# EAGLE board Board1 (EAGLE 7.5.0)
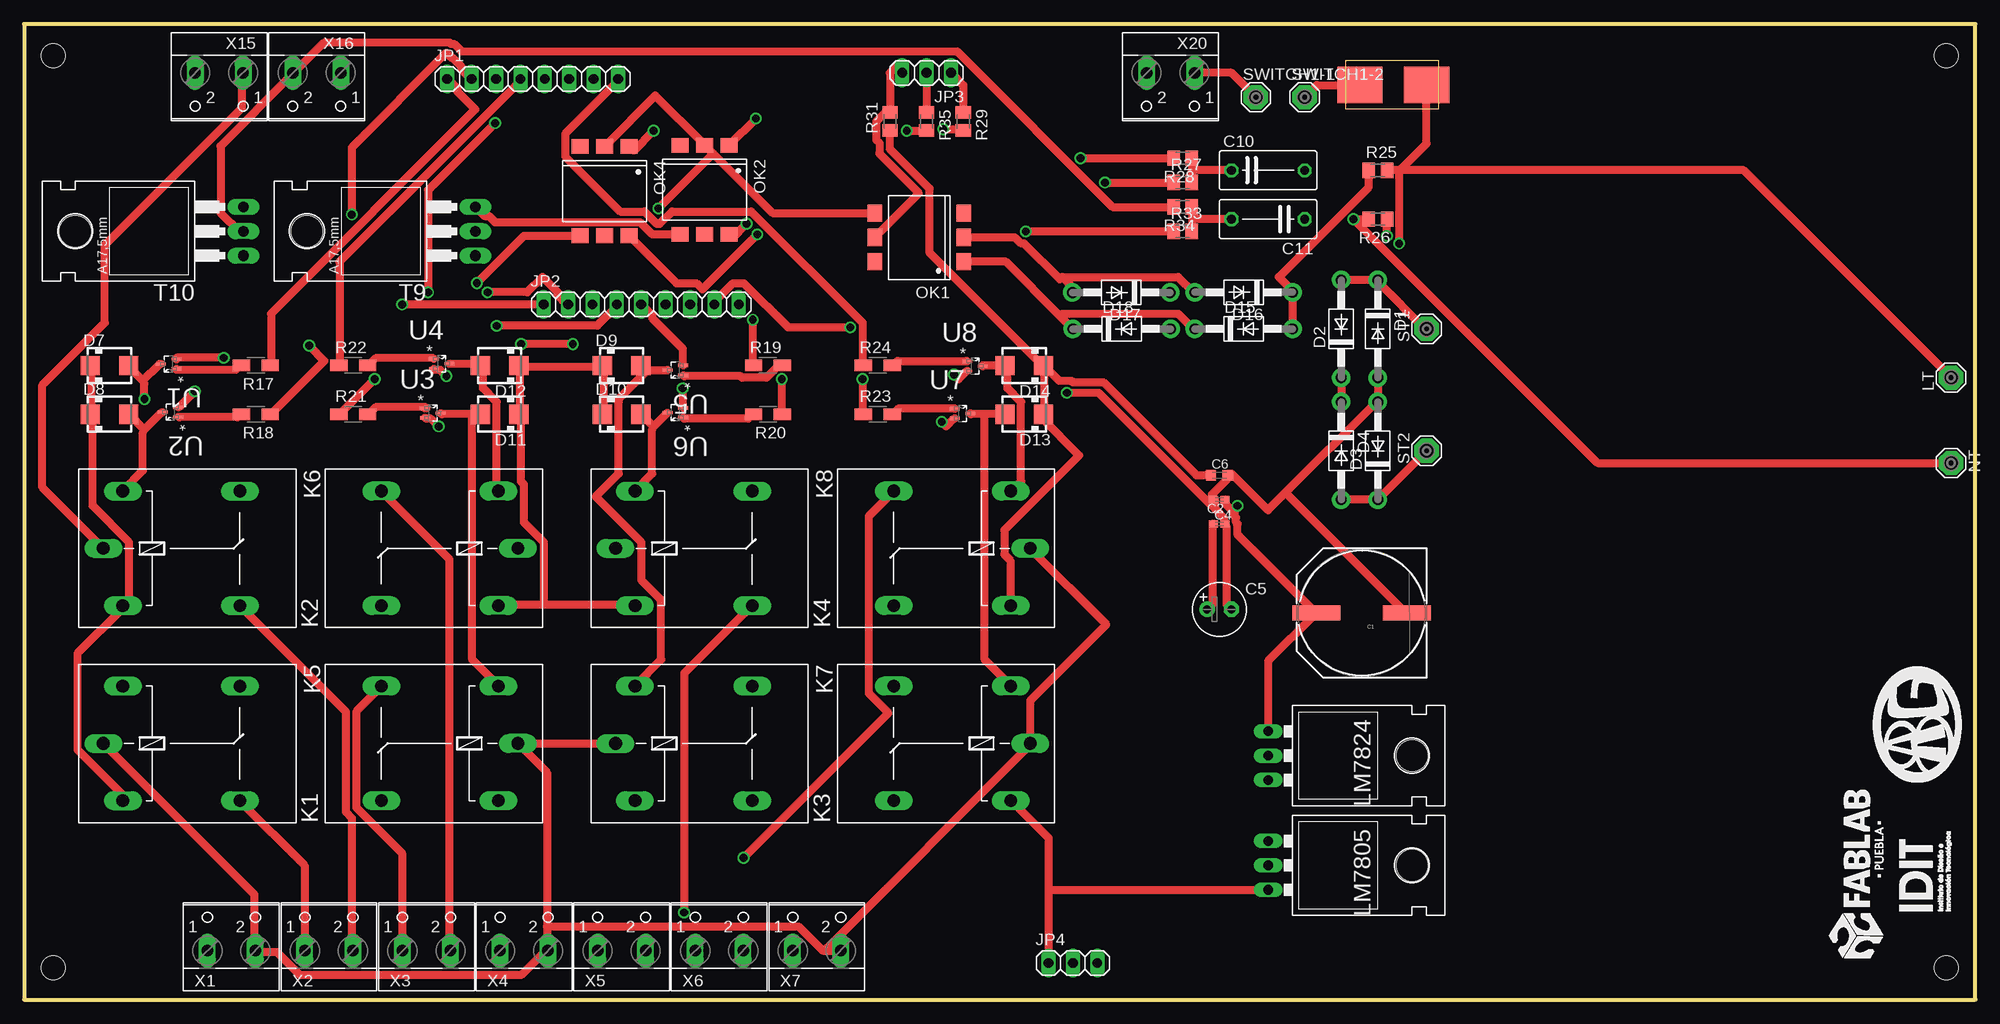
[diagram p0: board, top side]
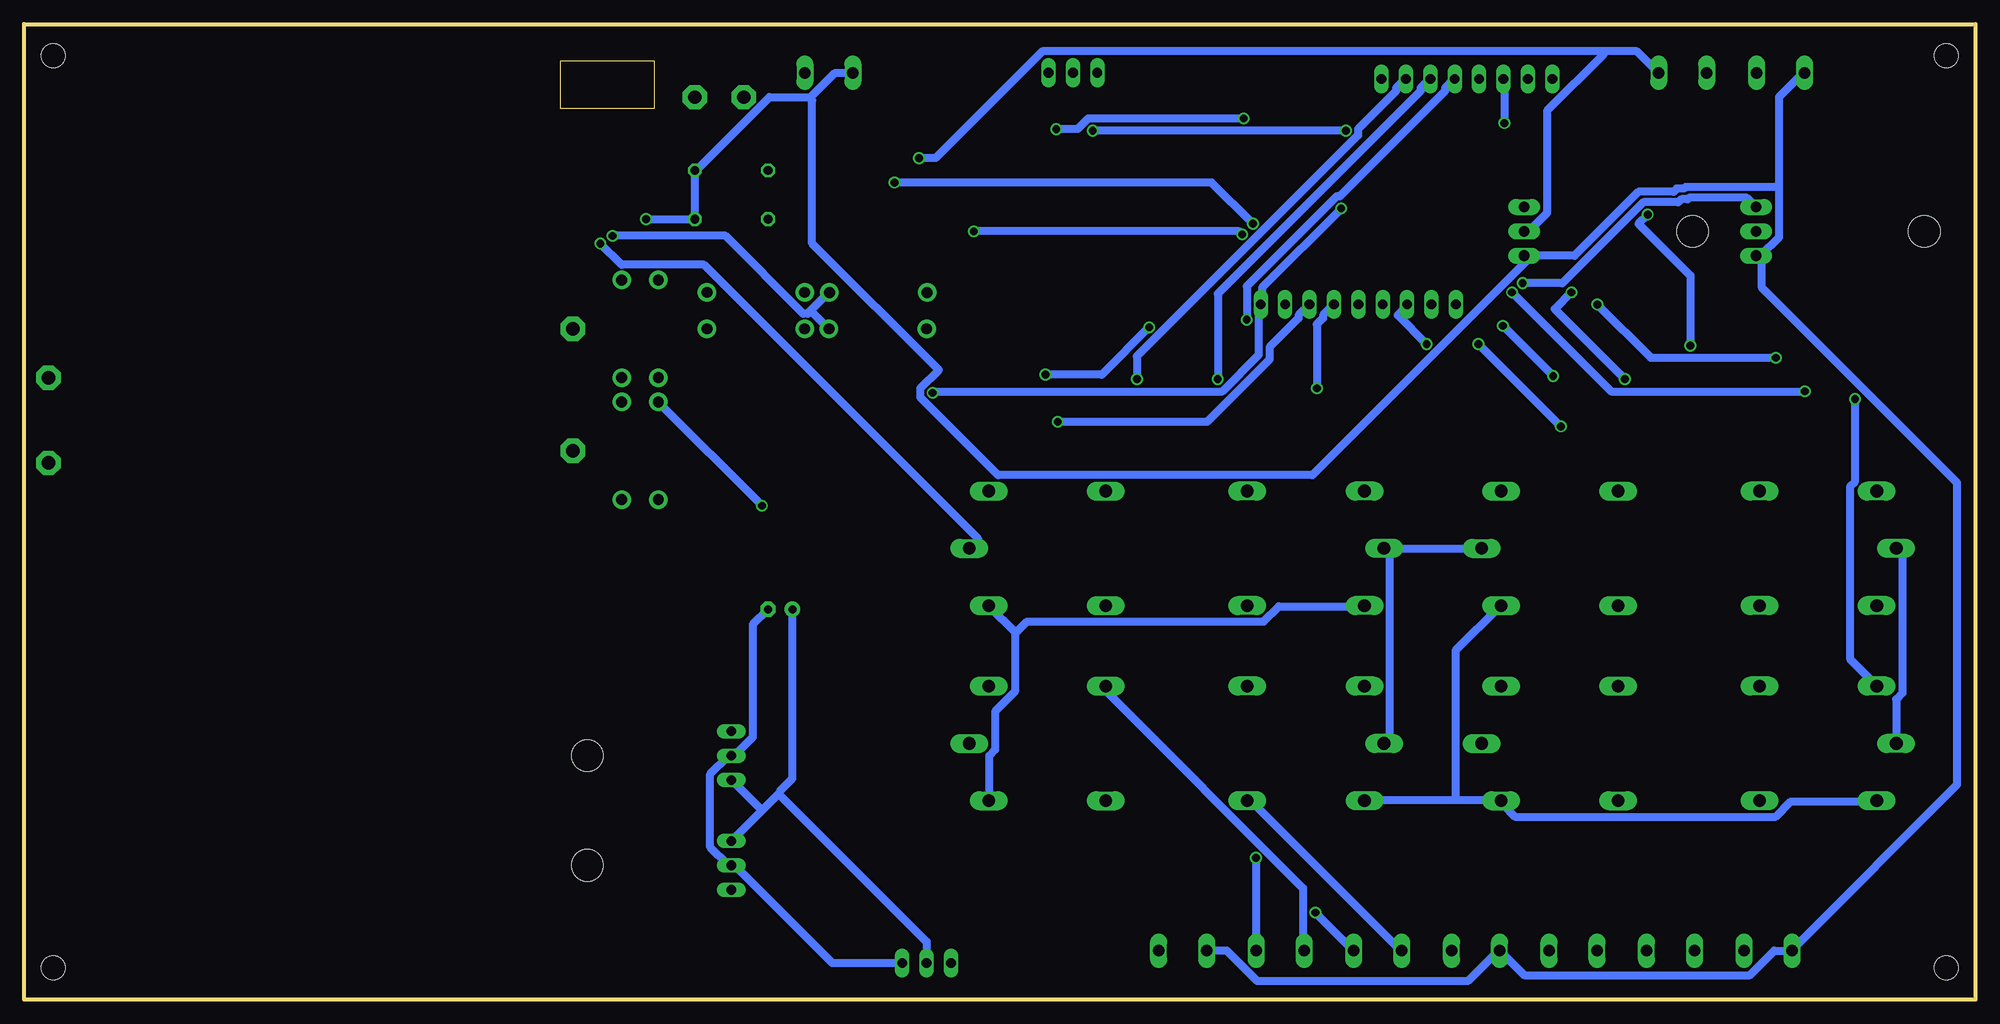
[diagram p1: board, bottom side, seen from below]

Size 203.2 x 101.6 mm. Coordinates in mm from the lower left corner, seen from the top.
Outline: 0,0 203.2,0 203.2,101.6 0,101.6 0,0
Copper layers (1*16): Top 0.035mm / dielectric 1.5mm / Bottom 0.035mm
Design rules "default *": minimum track width 32mil, minimum drill 32mil, track to track 8mil, track to pad 8mil, pad to pad 8mil, via to via 8mil, smd to smd 8mil, copper to edge 1.29031875mm, drill to drill 8mil, minimum pad ring 10mil, minimum via ring 8mil, stop-mask expansion 4mil, vias tented up to drill 0mil, thermal gap 10mil
Holes 2.5 mm at 3.05,3.3 3.05,98.3 200.15,3.3 200.15,98.3

## Footprints (pad centres in the part's own frame; a part is rotated, then mirrored left to right if it is on the bottom)
PANASONIC_H13 = smd 5 x 1.6: + 4.7,0; - -4.7,0
C0402K = smd 0.925 x 0.74: 1 -0.6,0; 2 0.6,0
E2,5-6 = drill 0.813 pad 1.6: + -1.27,0 | drill 0.813 pad 1.6 octagon: - 1.27,0
C0603K = smd 1.05 x 1.08: 1 -0.875,0; 2 0.875,0
C075-042X103 = drill 0.914 octagon: 1 -3.81,0; 2 3.81,0
DO41-10 = drill 1.118 pad 1.93: A 5.08,0; C -5.08,0
SMA = smd 2 x 2: A 2,0; C -2,0
1X08 = drill 1.016 long: 1 -8.89,0; 2 -6.35,0; 3 -3.81,0; 4 -1.27,0; 5 1.27,0; 6 3.81,0; 7 6.35,0; 8 8.89,0
1X09 = drill 1.016 long: 1 -10.16,0; 2 -7.62,0; 3 -5.08,0; 4 -2.54,0; 5 0,0; 6 2.54,0; 7 5.08,0; 8 7.62,0; 9 10.16,0
1X03 = drill 1.016 long: 1 -2.54,0; 2 0,0; 3 2.54,0
G5LE = drill 1.321 long: 1 -7.493,-5.969; 2 -7.493,5.969; O 4.699,5.969; P -9.525,0; S 4.699,-5.969
TO-220-ALT = drill 1.016 long: GND 0,-3.81; IN -2.54,-3.81; OUT 2.54,-3.81 | hole 3.302: 0,11.176
SE14 = drill 1.397 pad 2.54 octagon: MP 0,0
DIL6-SMD = smd 1.78 x 1.52: 1 -2.54,-4.645; 2 0,-4.645; 3 2.54,-4.645; 4 2.54,4.645; 5 0,4.645; 6 -2.54,4.645
R1206W = smd 1.8 x 1.2: 1 -1.499,0; 2 1.499,0
M0805 = smd 1.3 x 1.6: 1 -0.95,0; 2 0.95,0
TO220AB = drill 1.118 long: 1 -2.54,-6.35; 2 0,-6.35; 3 2.54,-6.35 | hole 3.302: 0,11.176
SOT50P175X90-3N = smd 1.016 x 0.356: 1 -0.813,0.508; 2 -0.813,-0.508 | smd 1.016 x 0.305: 3 0.813,0
LITTLEFUSE = smd 4.699 x 3.81: P$1 1.27,2.54; P$2 8.204,2.54
W237-102 = drill 1.194 long: 1 -2.5,-1.27; 2 2.5,-1.27

## Placement (x,y rotation side)
C1  [PANASONIC_H13]  139.29,40.26 180 top
C2  10nF  [C0402K]  124.46,52.07 180 top
C4  10nF  [C0402K]  124.46,49.53 0 top
C5  220uF  [E2,5-6]  124.46,40.64 0 top
C6  .47uF  [C0603K]  124.46,54.61 0 top
C10  100nF  [C075-042X103]  129.54,86.36 0 top
C11  100nF  [C075-042X103]  129.54,81.28 180 top
D1  1N4004  [DO41-10]  140.97,69.85 270 top
D2  1N4004  [DO41-10]  137.16,69.85 90 top
D3  1N4004  [DO41-10]  140.97,57.15 90 top
D4  1N4004  [DO41-10]  137.16,57.15 270 top
D7  S1M  [SMA]  8.89,66.04 0 top
D8  S1M  [SMA]  8.89,60.96 0 top
D9  S1M  [SMA]  62.23,66.04 0 top
D10  S1M  [SMA]  62.23,60.96 0 top
D11  S1M  [SMA]  49.53,60.96 180 top
D12  S1M  [SMA]  49.53,66.04 180 top
D13  S1M  [SMA]  104.14,60.96 180 top
D14  S1M  [SMA]  104.14,66.04 180 top
D15  1N4004  [DO41-10]  127,69.85 0 top
D16  1N4004  [DO41-10]  127,73.66 180 top
D17  1N4004  [DO41-10]  114.25,73.63 180 top
D18  1N4004  [DO41-10]  114.3,69.85 0 top
JP1  [1X08]  52.96,95.89 0 top
JP2  [1X09]  64.26,72.39 0 top
JP3  [1X03]  93.98,96.52 180 top
JP4  [1X03]  109.22,3.81 0 top
K1  G5LE  [G5LE]  17.78,26.67 0 top
K2  G5LE  [G5LE]  17.78,46.99 0 top
K3  G5LE  [G5LE]  71.12,26.67 0 top
K4  G5LE  [G5LE]  71.12,46.99 0 top
K5  G5LE  [G5LE]  41.91,26.67 180 top
K6  G5LE  [G5LE]  41.91,46.99 180 top
K7  G5LE  [G5LE]  95.25,26.67 180 top
K8  G5LE  [G5LE]  95.25,46.99 180 top
LM7805  [TO-220-ALT]  133.35,13.97 270 top
LM7824  [TO-220-ALT]  133.35,25.4 270 top
LT  SE14  [SE14]  200.66,64.77 90 top
NT  SE14  [SE14]  200.66,55.88 270 top
OK1  4N25SM  [DIL6-SMD]  93.22,79.38 90 top
OK2  MOC3021  [DIL6-SMD]  70.87,84.33 180 top
OK4  MOC3021  [DIL6-SMD]  60.45,84.2 180 top
R17  1kΩ  [R1206W]  24.13,66.04 180 top
R18  1kΩ  [R1206W]  24.13,60.96 180 top
R19  1kΩ  [R1206W]  77.47,66.04 0 top
R20  1kΩ  [R1206W]  77.47,60.96 180 top
R21  1kΩ  [R1206W]  34.29,60.96 0 top
R22  1kΩ  [R1206W]  34.29,66.04 0 top
R23  1kΩ  [R1206W]  88.9,60.96 0 top
R24  1kΩ  [R1206W]  88.9,66.04 0 top
R25  30kΩ  [M0805]  140.97,86.36 0 top
R26  30kΩ  [M0805]  140.97,81.28 180 top
R27  180Ω  [M0805]  120.65,85.09 0 top
R28  2.4kΩ  [M0805]  120.65,87.63 180 top
R29  180Ω  [M0805]  97.79,91.44 270 top
R31  10kΩ  [M0805]  90.17,91.44 90 top
R33  180Ω  [M0805]  120.65,80.01 0 top
R34  2.4kΩ  [M0805]  120.65,82.55 180 top
R35  180Ω  [M0805]  93.98,91.44 270 top
ST1  SE14  [SE14]  146.05,69.85 90 top
ST2  SE14  [SE14]  146.05,57.15 90 top
SWITCH1-1  SE14  [SE14]  128.27,93.98 0 top
SWITCH1-2  SE14  [SE14]  133.35,93.98 0 top
T9  BTA206  [TO220AB]  40.64,80.01 90 top
T10  BTA206  [TO220AB]  16.51,80.01 90 top
U1  BC857BT-7-F  [SOT50P175X90-3N]  15.06,66.19 180 top
U2  BC857BT-7-F  [SOT50P175X90-3N]  15.25,61.18 180 top
U3  BC857BT-7-F  [SOT50P175X90-3N]  42.57,61.08 0 top
U4  BC857BT-7-F  [SOT50P175X90-3N]  43.48,66.21 0 top
U5  BC857BT-7-F  [SOT50P175X90-3N]  67.82,65.54 180 top
U6  BC857BT-7-F  [SOT50P175X90-3N]  67.82,61.13 180 top
U7  BC857BT-7-F  [SOT50P175X90-3N]  97.73,61.03 0 top
U8  BC857BT-7-F  [SOT50P175X90-3N]  99.03,65.96 0 top
U$1  LILFUSE  [LITTLEFUSE]  147.32,97.79 180 top
X1  [W237-102]  21.59,6.35 0 top
X2  [W237-102]  31.75,6.35 0 top
X3  [W237-102]  41.91,6.35 0 top
X4  [W237-102]  52.07,6.35 0 top
X5  [W237-102]  62.23,6.35 0 top
X6  [W237-102]  72.39,6.35 0 top
X7  [W237-102]  82.55,6.35 0 top
X15  [W237-102]  20.32,95.25 180 top
X16  [W237-102]  30.48,95.25 180 top
X20  [W237-102]  119.38,95.25 180 top

## Library data of the parts
C1 = SparkFun-Capacitors
C2 C4-C6 C10 C11 R17-R29 R31 R33-R35 = resistor
D1-D4 D15-D18 = adafruit
D7-D14 = diode
JP1-JP4 = pinhead
K1-K8 = relay; OC_FARNELL: unknown; OC_NEWARK: unknown
LM7805 LM7824 = SparkFun-PowerIC; PROD_ID: VREG-08450; SF_ID: COM-00107
LT NT ST1 ST2 SWITCH1-1 SWITCH1-2 = solpad
OK1 = optocoupler; MF: FAIRCHILD SEMICONDUCTOR; MPN: 4N25SM; OC_FARNELL: 1021152; OC_NEWARK: 34C2020
OK2 OK4 = optocoupler; MF: FAIRCHILD SEMICONDUCTOR; MPN: MOC3033S-M; OC_FARNELL: unknown; OC_NEWARK: 05C2878
T9 T10 = triac
U1-U8 = Diodes_Inc_By_element14_Batch_1; MPN: BC857BT-7-F; OC_FARNELL: 1773650; OC_NEWARK: 51R6404; PACKAGE: SOT-523-3; SUPPLIER: Diodes Inc
U$1 = oliver
X1-X7 X15 X16 X20 = con-wago-500; MPN: 237-102; OC_FARNELL: unknown; OC_NEWARK: 70K9898

## Nets
5V: C6.1 D7.C D8.C D9.C D10.C D11.C D12.C D13.C D14.C JP4.1 K1.1 K2.1 K3.1 K4.1 K5.2 K6.2 K7.2 K8.2 LM7805.OUT R31.1
24V: C4.1 C5.+ JP4.2 LM7805.IN LM7824.OUT
DO0: JP1.1 R17.1
DO1: JP1.2 R18.1
DO2: JP1.3 R21.1
DO3: JP1.4 R22.1
DO4: JP1.5 R19.1
DO5: JP1.6 R20.1
DO6: JP1.7 R23.1
DO7: JP1.8 R24.1
GND: C1.- C2.2 C4.2 C5.- C6.2 D1.A D3.A JP2.9 JP4.3 LM7805.GND LM7824.GND OK1.4 OK2.2 OK4.2
L: K1.P K2.P K3.P K4.P K5.P K6.P K7.P K8.P LT.MP R25.2 X1.2 X4.2 X7.2 X15.1
LEDO0: JP2.1 U1.2
LEDO1: JP2.2 U2.2
LEDO2: JP2.3 U3.2
LEDO3: JP2.4 U4.2
LEDO4: JP2.5 U5.2
LEDO5: JP2.6 U6.2
LEDO6: JP2.7 U7.2
LEDO7: JP2.8 U8.2
LOAD0: R28.2 T9.2 X16.1
LOAD1: R34.2 T10.2 X16.2
N: C10.2 C11.1 NT.MP R26.2 T9.1 T10.1 X1.1 X4.1 X7.1 X15.2 X20.2
N$2: SWITCH1-1.MP X20.1
N$4: D3.C D4.A ST2.MP
N$5: D8.A K2.2 U2.3
N$7: R18.2 U2.1
N$9: D11.A K5.1 U3.3
N$17: D7.A K1.2 U1.3
N$18: D9.A K3.2 U5.3
N$19: R17.2 U1.1
N$20: R19.2 U5.1
N$21: D10.A K4.2 U6.3
N$22: R20.2 U6.1
N$24: R21.2 U3.1
N$25: D12.A K6.1 U4.3
N$26: R22.2 U4.1
N$27: D13.A K7.1 U7.3
N$28: R23.2 U7.1
N$29: D14.A K8.1 U8.3
N$30: R24.2 U8.1
N$31: D16.A OK1.2
N$32: D15.C D18.C OK1.1
N$33: D15.A D16.C R25.1
N$34: D17.C D18.A R26.1
N$35: OK2.6 R27.1
N$38: C10.1 R27.2 R28.1
N$39: OK2.4 T9.3
N$42: OK2.1 R29.2
N$45: OK4.6 R33.1
N$46: R33.2 R34.1
N$47: OK4.4 T10.3
N$48: OK4.1 R35.2
N$57: SWITCH1-2.MP
N$65: C1.+ C2.1 D2.C D4.C LM7824.IN
N$66: D1.C D2.A ST1.MP
OUT0: K1.S X2.1
OUT1: K2.S X2.2
OUT2: K5.S X3.1
OUT3: K6.S X3.2
OUT4: K3.S X5.1
OUT5: K4.S X5.2
OUT6: K7.S X6.1
OUT7: K8.S X6.2
P0: JP3.1 R29.1
P1: JP3.2 R35.1
S$1: C11.2
S$2: D17.A
Z0: JP3.3 OK1.5 R31.2

## Tracks (layer width: path | path; a pad name or v marks a point on that pad's centre or on a via)
5V
  Top 0.813: D7.C 6.99,66.04 6.99,60.96 D8.C 7.14,60.64 7.14,51.44 10.95,47.62 10.95,41.75 10.32,41.12 K2.1 10.16,40.64 5.56,36.04 5.56,26.04 10.16,21.43 10.16,20.8 K1.1 | D10.C 60.33,60.96 60.33,66.04 D9.C 59.85,65.88 51.91,65.88 D12.C 51.59,66.04 51.59,60.96 D11.C 51.75,60.64 51.75,53.98 52.07,53.66 52.07,49.69 54.13,47.62 54.13,41.12 | 54.13,41.12 63.5,41.12 K4.1 | 54.13,41.12 49.53,41.12 K6.2 | 106.68,11.43 106.68,16.83 102.87,20.64 K7.2 | 106.68,11.43 JP4.1 | 106.68,11.43 LM7805.OUT | C6.1 122.08,54.61 112.39,64.29 109.22,64.29 109.06,64.45 107.79,64.45 106.2,66.04 D14.C | R31.1 90.17,88.58 94.3,84.45 94.3,77.79 105.89,66.2 D14.C | D14.C 106.2,65.56 106.2,60.96 D13.C 105.89,60.64 109.86,56.67 102.08,48.9 102.08,46.35 102.71,45.72 102.71,41.12 K8.2
  Bottom 0.813: 54.13,20.8 63.5,20.8 K3.1 | 54.13,20.8 49.53,20.8 K5.2 49.21,20.32 47.94,19.05 20.8,19.05 19.21,20.64 10.32,20.64 K1.1 | 54.13,20.8 54.13,36.35 49.53,40.96 K6.2 | 100.01,38.26 100.01,32.07 102.08,30 102.08,26.04 102.71,25.4 102.71,20.8 K7.2 | 100.01,38.26 102.71,40.96 K8.2 | K4.1 63.66,40.96 72.55,40.96 74.14,39.37 98.74,39.37 99.69,38.42 100.01,38.26
24V
  Top 0.813: C5.+ 123.83,41.27 123.83,49.53 C4.1
  Bottom 0.813: JP4.2 109.22,6.03 124.62,21.43 | LM7805.IN 126.36,19.68 | 126.36,19.68 124.62,21.43 | 126.36,19.68 LM7824.OUT | C5.+ 123.19,23.02 124.46,21.75 124.62,21.43
DO0
  Top 0.813: R17.1 25.72,66.04 25.72,71.44 46.99,92.71 45.09,94.61 45.09,94.93 44.13,95.89 JP1.1
DO1  (via drill 0.81)
  Top 0.813: v29.69,68.1 31.27,66.52 25.72,60.96 R18.1 | v34.13,81.76 34.13,88.74 43.97,98.58 44.45,98.11 44.61,98.11 45.56,97.16 45.56,96.84 46.51,95.89 JP1.2
  Bottom 0.813: v29.69,68.1 29.69,75.41 35.08,80.8 v34.13,81.76
DO2  (via drill 0.81)
  Top 0.813: v36.51,64.61 32.86,60.96 R21.1 | v42.07,73.66 42.07,84.3 v49.05,91.28
  Bottom 0.813: v36.51,64.61 43.81,71.91 v42.07,73.66 | v49.05,91.28 49.05,95.89 JP1.3
DO3
  Top 0.813: R22.1 32.86,66.04 32.86,76.83 51.75,95.73 51.59,95.89 JP1.4
DO4  (via drill 0.81)
  Top 0.813: v75.88,70.8 75.88,66.04 R19.1
  Bottom 0.813: v75.88,70.8 75.88,74.3 66.52,83.66 66.2,83.66 55.24,94.61 55.24,94.93 54.29,95.89 JP1.5
DO5  (via drill 0.81)
  Top 0.813: v78.9,64.61 78.9,60.96 R20.1
  Bottom 0.813: v78.9,64.61 78.9,73.5 57.78,94.61 57.78,94.93 56.83,95.89 JP1.6
DO6  (via drill 0.81)
  Top 0.813: v87.31,64.61 87.31,60.96 R23.1
  Bottom 0.813: v87.31,64.61 87.31,66.99 64.29,90.01 64.29,90.65 60.33,94.61 60.33,94.93 59.37,95.89 JP1.7
DO7
  Top 0.813: R24.1 87.31,66.04 87.31,70.48 75.72,82.07 67.47,82.07 66.2,80.8 65.88,80.8 64.61,82.07 62.07,82.07 56.36,87.79 56.36,90.17 61.91,95.73 61.75,95.89 JP1.8
GND  (via drill 0.81)
  Top 0.813: OK4.2 60.48,88.9 65.72,94.14 70.8,89.06 OK2.2 71.12,88.74 71.75,88.11 | OK1.4 77.95,81.92 71.75,88.11 | 71.75,88.11 v66.04,82.39 | D1.A D3.A 140.65,62.07 131.37,52.78 | 123.98,51.44 123.98,52.07 C2.2 123.83,52.39 123.67,52.55 125.25,54.13 125.25,54.61 C6.2 125.73,54.77 129.54,50.96 131.37,52.78 | 123.98,51.44 123.98,51.12 124.94,50.16 124.94,49.53 C4.2 125.25,49.21 125.25,41.12 C5.- | 131.37,52.78 143.83,40.32 143.99,40.32 C1.- | v108.58,63.18 111.92,63.18 123.67,51.44 123.98,51.44
  Bottom 0.813: v66.04,82.39 74.3,74.14 74.3,72.39 JP2.9 74.61,72.07 74.61,67.15 78.42,63.34 108.43,63.34 v108.58,63.18 | JP4.3 119.06,3.81 129.38,14.13 LM7805.GND 129.86,13.97 131.76,15.88 131.76,23.5 129.86,25.4 LM7824.GND 129.22,25.56 129.06,25.56 127.32,27.3 127.32,39.05 C5.-
L  (via drill 0.81)
  Top 0.813: K1.P 23.97,10.95 23.97,5.08 X1.2 24.45,4.92 26.35,4.92 28.73,2.54 51.75,2.54 54.13,4.92 X4.2 54.45,5.08 54.45,7.62 | K2.P 1.91,53.34 1.91,63.98 8.41,70.48 8.41,78.58 22.7,92.87 22.7,96.52 X15.1 | 143.26,86.36 179.07,86.36 LT.MP | 143.26,86.36 143.19,86.36 | 143.19,86.36 R25.2 | K8.P 112.71,39.05 104.78,31.11 K7.P 104.62,26.35 83.66,5.4 83.66,5.08 | 54.45,7.62 54.45,23.65 K5.P K3.P | 83.66,5.08 83.19,5.08 80.64,7.62 54.45,7.62 | 83.66,5.08 X7.2 | v143.19,78.74 143.19,86.36 | 143.26,86.36 146.05,89.15 146.05,95
  Bottom 0.813: K1.P 8.26,31.27 7.62,31.91 7.62,46.35 K2.P | K6.P K4.P 60.96,46.67 60.96,27.3 K3.P | v143.19,78.74 140.97,76.52 132.4,76.52 103.82,47.94 K8.P
LEDO0  (via drill 0.81)
  Top 0.813: v20.8,66.83 15.88,66.83 U1.2 | JP2.1 v39.37,72.39
  Bottom 0.813: v20.8,66.83 33.81,66.83 v39.37,72.39
LEDO1  (via drill 0.81)
  Top 0.813: v17.78,63.34 16.19,61.75 U2.2 | v48.26,73.66 52.39,73.66 53.98,75.25 55.56,73.66 55.56,73.34 56.52,72.39 JP2.2
  Bottom 0.813: v17.78,63.34 37.94,63.34 v48.26,73.66
LEDO2  (via drill 0.81)
  Top 0.813: v43.18,59.69 42.39,60.48 41.91,60.48 U3.2 | v57.15,68.26 v51.75,68.26
  Bottom 0.813: v51.75,68.26 v43.18,59.69 | v57.15,68.26 60.17,71.28 59.05,72.39 JP2.3
LEDO3  (via drill 0.81)
  Top 0.813: v43.97,64.93 43.34,65.56 42.7,65.56 U4.2 | v49.21,70.17 59.69,70.17 61.75,72.23 61.59,72.39 JP2.4
  Bottom 0.813: v49.21,70.17 v43.97,64.93
LEDO4
  Top 0.813: U5.2 68.58,66.2 68.58,67.79 65.41,70.96 65.41,71.28 64.29,72.39 JP2.5
LEDO5  (via drill 0.81)
  Top 0.813: v68.58,63.66 68.58,61.75 U6.2
  Bottom 0.813: v68.58,63.66 68.58,70.33 67.94,70.96 67.94,71.28 66.83,72.39 JP2.6
LEDO6  (via drill 0.81)
  Top 0.813: v95.57,60.17 96.04,59.69 96.84,60.48 U7.2
  Bottom 0.813: v95.57,60.17 80.01,60.17 73.5,66.67 73.5,67.94 70.48,70.96 70.48,71.28 69.37,72.39 JP2.7
LEDO7  (via drill 0.81)
  Top 0.813: v96.84,65.09 97.31,64.61 98.11,65.41 U8.2 | v86.04,70.01 79.53,70.01 74.93,74.61 73.82,74.61 71.75,72.55 71.91,72.39 JP2.8
  Bottom 0.813: v96.84,65.09 90.96,65.09 v86.04,70.01
LOAD0  (via drill 0.81)
  Top 0.813: v110.01,87.63 R28.2
  Bottom 0.813: v110.01,87.63 108.27,87.63 97.16,98.74 38.73,98.74 | 38.73,98.74 35.24,98.74 33.02,96.52 X16.1 | T9.2 46.51,80.01 44.61,81.92 44.61,92.55 38.73,98.42 38.73,98.74
LOAD1
  Top 0.813: R34.2 113.35,82.55 97.16,98.74 45.56,98.74 44.77,99.54 44.45,99.54 44.29,99.69 31.27,99.69 28.1,96.52 X16.2 27.78,96.2 20.48,88.9 20.48,81.92 22.38,80.01 T10.2
N  (via drill 0.81)
  Top 0.813: R26.2 v138.43,81.28 163.83,55.88 NT.MP
  Bottom 0.813: X20.2 118.75,96.52 121.28,93.98 | 121.28,93.98 125.57,93.98 133.03,86.52 C10.2 C11.1 v138.43,81.28 | 20.48,84.61 20.48,93.98 17.94,96.52 X15.2 | 20.48,84.61 20.48,79.38 22.38,77.47 T10.1 22.23,77.15 22.23,74.14 1.91,53.82 1.91,22.38 18.89,5.4 X1.1 20.95,5.08 23.5,2.54 46.99,2.54 49.53,5.08 X4.1 49.85,4.92 52.86,1.91 74.77,1.91 77.95,5.08 X7.1 | 20.48,84.61 30.16,84.61 30.32,84.45 31.11,84.45 31.43,84.14 35.08,84.14 41.75,77.47 T9.1 46.51,77.15 69.06,54.61 101.76,54.61 109.86,62.71 109.86,63.66 107.95,65.56 121.13,78.74 121.13,93.66 121.28,93.98
N$2
  Top 0.813: X20.1 125.73,96.52 SWITCH1-1.MP
N$4
  Top 0.813: D4.A D3.C ST2.MP
N$5
  Top 0.813: 12.54,59.37 14.29,61.12 U2.3 | 12.54,59.37 10.95,60.96 D8.A | 12.54,59.37 12.38,59.05 12.38,55.09 10.32,53.02 K2.2
N$7
  Top 0.813: U2.1 16.19,60.64 22.23,60.64 22.54,60.96 R18.2
N$9
  Top 0.813: U3.3 43.5,60.96 D11.A 46.67,60.64 46.67,35.4 49.37,32.7 K5.1
N$17  (via drill 0.81)
  Top 0.813: 12.38,64.45 14.13,66.2 U1.3 | 12.38,64.45 10.79,66.04 D7.A | v12.54,62.55 12.54,64.14 12.38,64.45
  Bottom 0.813: v12.54,62.55 12.54,53.98 13.02,53.5 13.02,35.4 10.32,32.7 K1.2
N$18
  Top 0.813: U5.3 66.99,65.56 64.77,65.56 64.29,66.04 D9.A 64.61,65.25 61.75,62.39 61.91,62.23 61.91,54.77 59.53,52.39 64.29,47.62 64.29,43.66 66.36,41.59 66.36,35.4 63.66,32.7 K3.2
N$19
  Top 0.813: U1.1 15.88,65.56 22.07,65.56 22.54,66.04 R17.2
N$20
  Top 0.813: U5.1 68.74,64.93 74.61,64.93 74.77,64.77 77.31,64.77 78.74,66.2 78.9,66.04 R19.2
N$21
  Top 0.813: 65.56,59.69 66.99,61.12 U6.3 | 65.56,59.69 64.29,60.96 D10.A | 65.56,59.69 65.41,59.37 65.41,54.77 63.66,53.02 K4.2
N$22
  Top 0.813: U6.1 68.74,60.48 75.41,60.48 75.88,60.96 R20.2
N$24
  Top 0.813: U3.1 41.91,61.59 41.75,61.75 36.67,61.75 35.88,60.96 R21.2
N$25
  Top 0.813: U4.3 44.45,66.2 47.31,66.2 47.47,66.04 D12.A 47.78,65.72 47.78,63.66 49.21,62.23 49.21,53.18 49.37,53.02 K6.1
N$26
  Top 0.813: U4.1 42.55,66.83 36.67,66.83 35.88,66.04 R22.2
N$27
  Top 0.813: D13.A 100.01,60.96 | 100.01,60.96 98.58,60.96 U7.3 | 100.01,60.96 100.01,35.4 102.71,32.7 K7.1
N$28
  Top 0.813: U7.1 96.84,61.59 91.12,61.59 90.49,60.96 R23.2
N$29
  Top 0.813: U8.3 99.85,66.04 D14.A 102.39,65.72 102.39,63.66 103.82,62.23 103.82,53.98 102.87,53.02 K8.1
N$30
  Top 0.813: U8.1 98.11,66.52 90.96,66.52 90.49,66.04 R24.2
N$31
  Top 0.813: OK1.2 103.19,79.38 103.82,78.74 104.14,78.74 107.87,75.01 108.11,75.25 120.17,75.25 121.76,73.66 D16.A
N$32
  Top 0.813: OK1.1 102.23,76.83 107.87,71.2 | D18.C 107.87,71.2 | D15.C 121.76,69.85 120.17,71.44 108.11,71.44 107.87,71.2
N$33
  Top 0.813: R25.1 140.02,84.61 130.65,75.25 132.08,73.82 D16.C D15.A
N$34  (via drill 0.81)
  Top 0.813: v141.92,79.53 R26.1
  Bottom 0.813: v141.92,79.53 130.18,79.53 122.08,71.44 121.6,71.44 121.31,71.73 121.28,71.75 | 121.28,71.75 D18.A | D17.C 119.41,73.64 121.28,71.75
N$35  (via drill 0.81)
  Top 0.813: v112.55,85.09 R27.1 | v75.25,80.8 73.82,79.38 73.5,79.69 OK2.6
  Bottom 0.813: v112.55,85.09 79.53,85.09 v75.25,80.8
N$38
  Top 0.813: 121.6,86.36 R28.1 | 121.6,86.36 R27.2 | C10.1 121.6,86.36
N$39
  Top 0.813: T9.3 47.94,81.6 48.42,81.6 49.05,80.96 64.14,80.96 65.41,79.69 68.26,79.69 OK2.4
N$42  (via drill 0.81)
  Top 0.813: v95.73,90.65 97.79,90.65 R29.2 | v76.2,91.76 73.5,89.06 OK2.1
  Bottom 0.813: v95.73,90.65 93.5,90.65 92.39,91.76 v76.2,91.76
N$45  (via drill 0.81)
  Top 0.813: v104.3,80.01 R33.1 | v76.36,79.69 70.64,73.98 70.01,74.61 67.94,74.61 63.02,79.53 OK4.6
  Bottom 0.813: v104.3,80.01 76.68,80.01 v76.36,79.69
N$46
  Top 0.813: R33.2 R34.1
N$47  (via drill 0.81)
  Top 0.813: v47.15,74.61 52.07,79.53 57.78,79.53 OK4.4
  Bottom 0.813: v47.15,74.61 43.02,74.61 34.61,83.03 30.96,83.03 30.64,83.34 30,83.34 29.84,83.5 23.81,83.5 T10.3
N$48  (via drill 0.81)
  Top 0.813: v91.92,90.49 R35.2 | v65.56,90.49 63.5,88.42 63.02,88.9 OK4.1
  Bottom 0.813: v65.56,90.49 v91.92,90.49
N$57
  Top 0.813: SWITCH1-2.MP 134.62,95.25 138.81,95.25
N$65  (via drill 0.81)
  Top 0.813: D2.C D4.C | 125.81,50.88 126.05,50.64 126.05,50.32 126.21,50.16 126.21,49.69 126.36,49.53 126.36,48.42 134.46,40.32 C1.+ 134.3,40.01 129.54,35.24 LM7824.IN | 125.81,50.88 125.09,51.59 125.09,52.07 C2.1 | 125.81,50.88 v126.36,51.44
  Bottom 0.813: v126.36,51.44 D4.C
N$66
  Top 0.813: D2.A D1.C 141.13,74.61 145.89,69.85 ST1.MP
OUT0
  Top 0.813: K1.S 29.21,13.97 29.21,5.08 X2.1
OUT1
  Top 0.813: K2.S 33.5,30 33.5,19.53 34.13,18.89 34.13,5.08 X2.2
OUT2
  Top 0.813: X3.1 39.37,5.08 39.37,15.24 34.61,20 34.61,30 37.15,32.54 K5.S
OUT3
  Top 0.813: K6.S 44.29,45.88 44.29,5.08 X3.2
OUT4
  Bottom 0.813: X5.1 59.85,5.08 75.56,20.8 75.72,20.64 K3.S
OUT5  (via drill 0.81)
  Top 0.813: v68.74,9.05 68.74,33.97 75.72,40.96 K4.S
  Bottom 0.813: v68.74,9.05 64.77,5.08 X5.2
OUT6
  Bottom 0.813: K7.S 90.81,32.38 70.01,11.59 70.01,5.08 X6.1
OUT7  (via drill 0.81)
  Top 0.813: v74.93,14.76 90.01,29.84 87.95,31.91 87.95,50.32 90.49,52.86 K8.S
  Bottom 0.813: v74.93,14.76 74.93,5.08 X6.2
P0
  Top 0.813: R29.1 97.79,95.25 JP3.1
P1
  Top 0.813: JP3.2 R35.1
S$1
  Top 0.813: C11.2 121.61,81.28
S$2
  Top 0.813: D17.A 109.17,74.22 108.13,75.26
Z0
  Top 0.813: JP3.3 90.81,97.16 90.17,96.52 R31.2 89.85,92.55 88.74,91.44 88.74,89.53 89.06,89.22 89.06,88.11 93.19,83.98 88.58,79.38 OK1.5